# Altium PCB usb_to_ttl.PcbDoc
Units mil, origin at the board's own origin, x right, y up, seen from the top; angles counter-clockwise.
Board outline 6000 x 4000 mil, 2 copper layers (Top Layer, Bottom Layer); 21 components, 15 nets, 65 pads, 0 vias.
Unrouted connection lines stored in the file: 33.
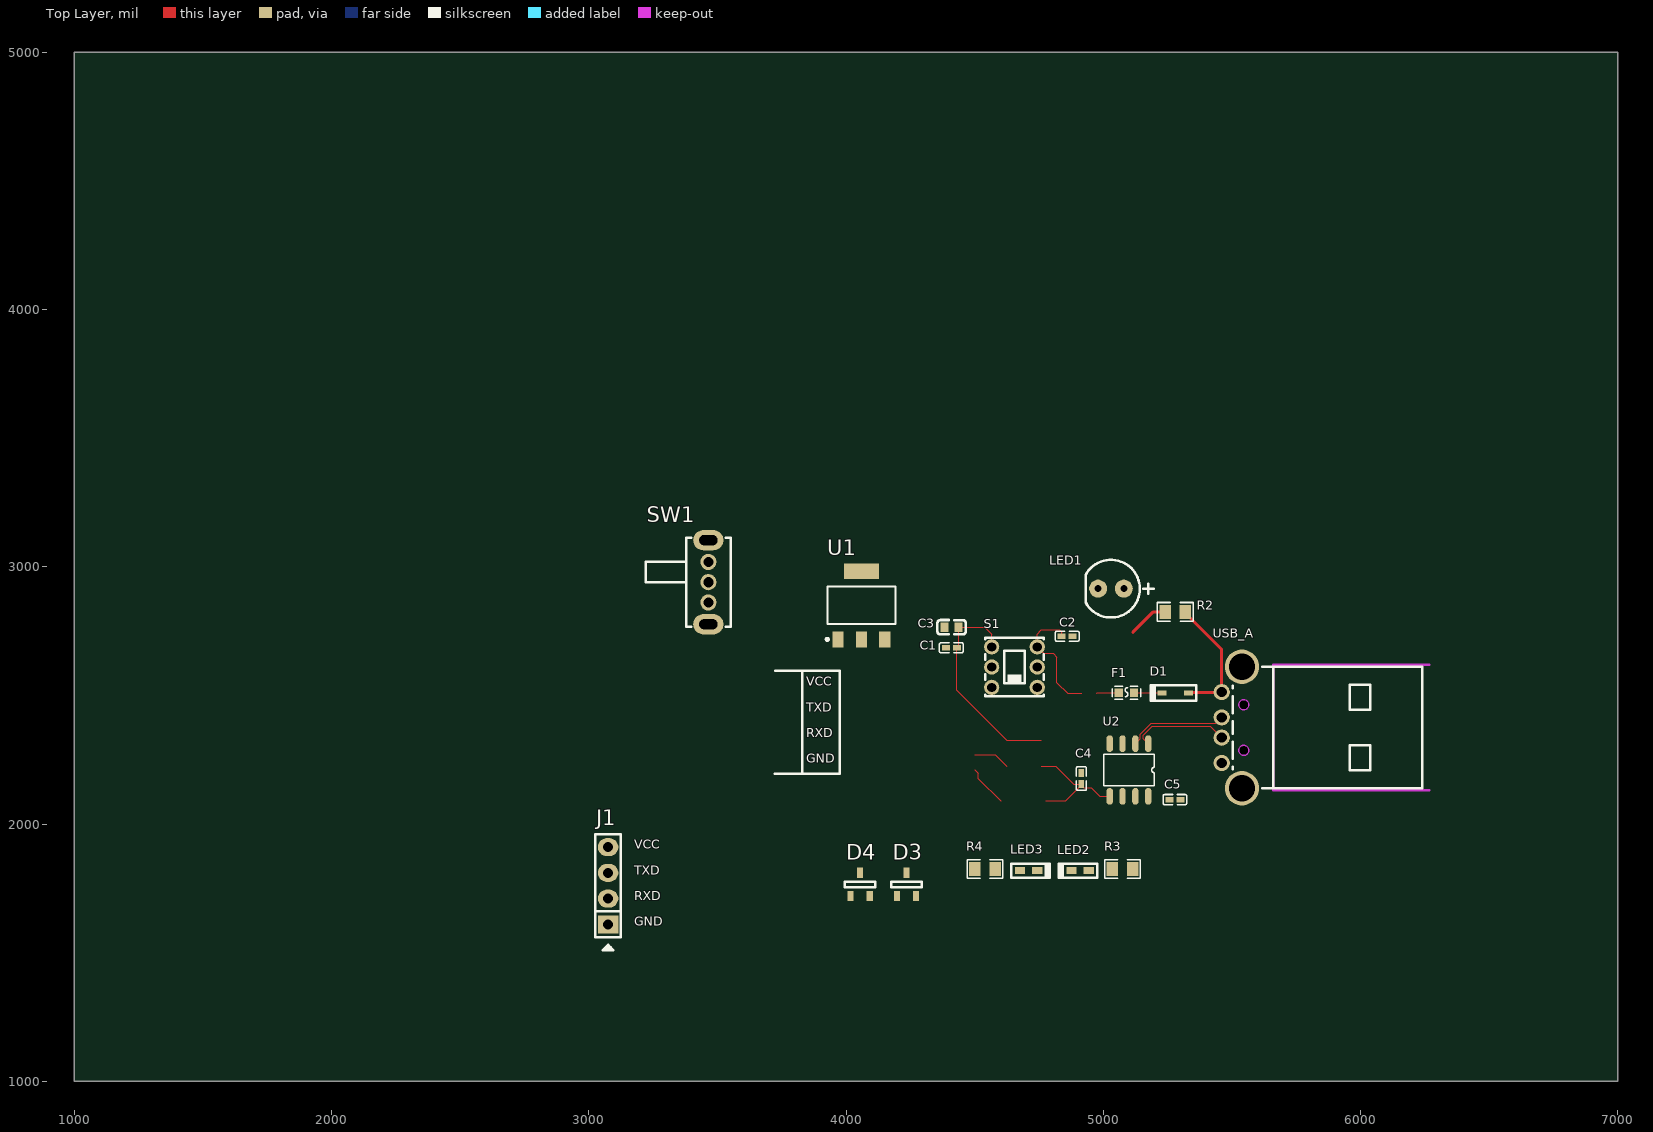
[diagram p0: Top Layer view]
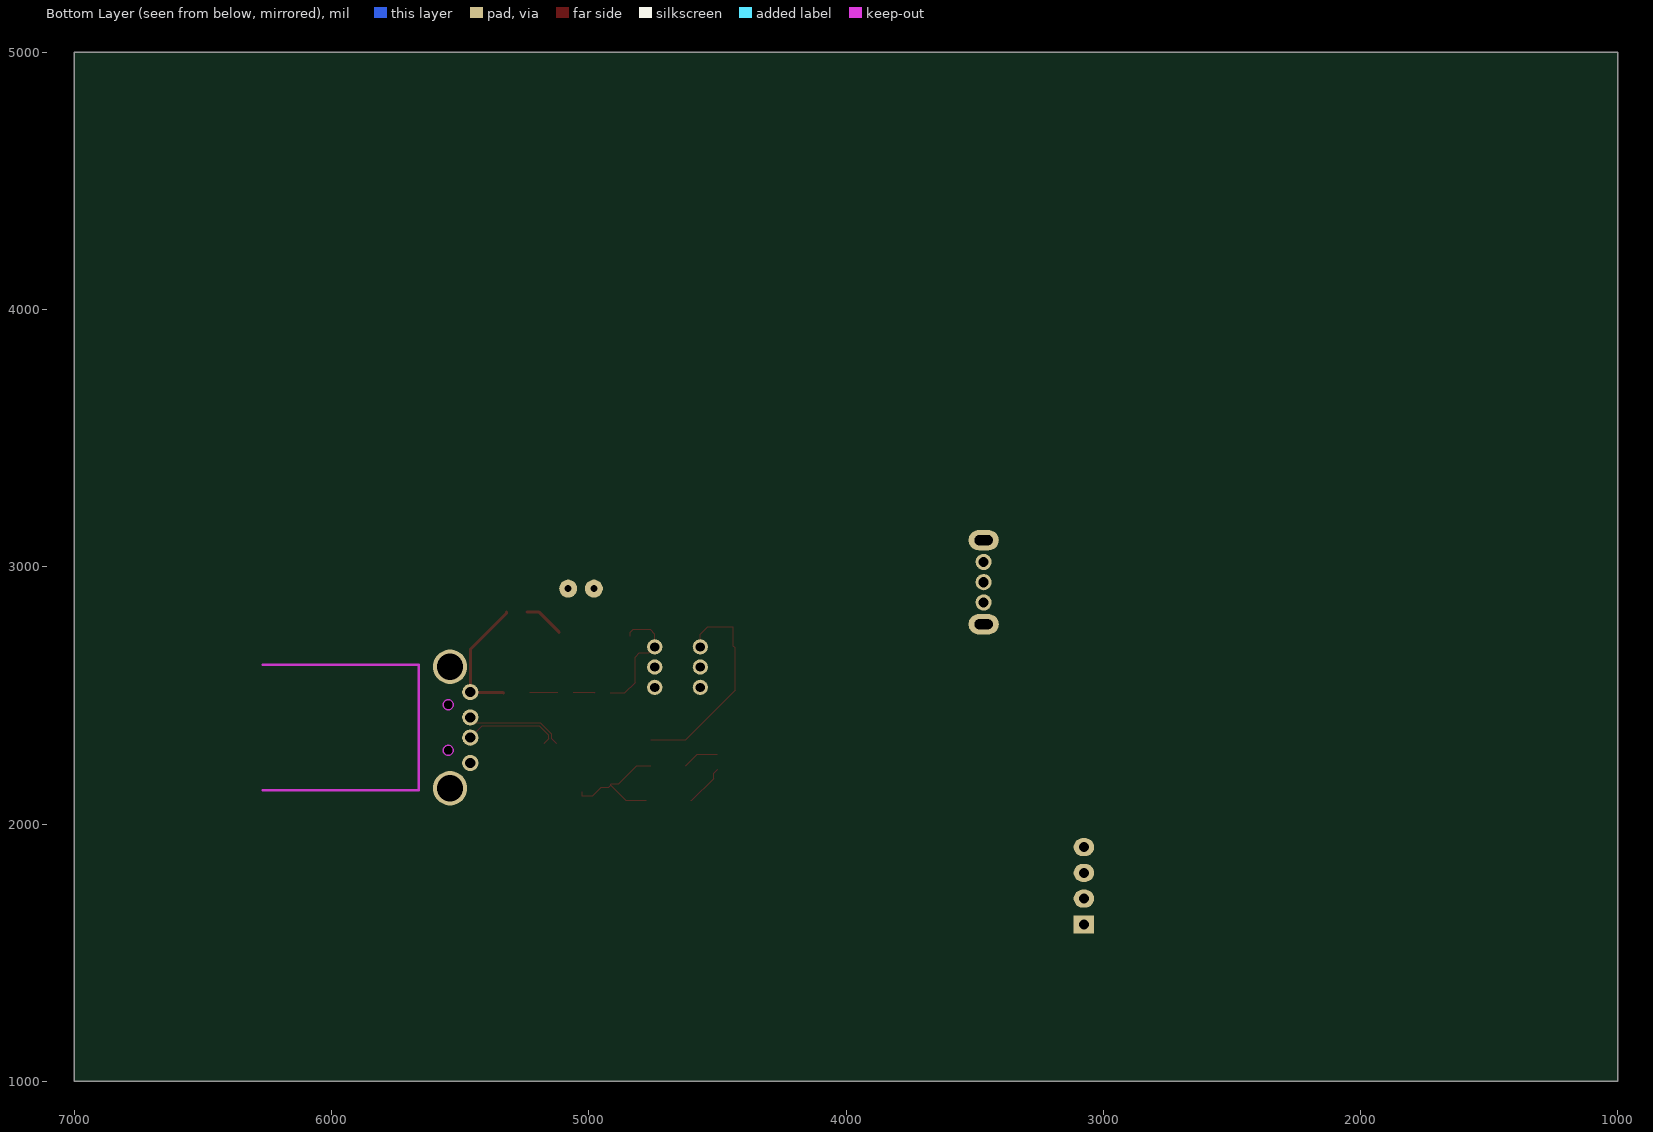
[diagram p1: Bottom Layer view, seen from below]

## Layer stack, top to bottom
Top Solder: solder mask 0.4, Solder Resist, Dk 3.5
Top Layer: signal copper 1.4
Dielectric 1: dielectric 12.6, FR-4, Dk 4.8
Bottom Layer: signal copper 1.4
Bottom Solder: solder mask 0.4, Solder Resist, Dk 3.5

## Board outline
1000,1000 7000,1000 7000,5000 1000,5000

## Design rules (kind name [scope] priority, off if disabled: settings)
Clearance [All] p1: gap=3.94 ignorepadtopadclearanceinfootprint=FALSE except(4.72: Arc-Via Track-Via)
DiffPairsRouting DiffPairsRouting_1 [All] p1: maxlimit=39.37 minlimit=3.94 mostfreqgap=7.09 toplayer_minwidth=3.94 toplayer_maxwidth=39.37 toplayer_prefwidth=3.94 bottomlayer_minwidth=3.94 bottomlayer_maxwidth=39.37 bottomlayer_prefwidth=3.94 maxuncoupledlength=500
HoleSize [All] p1: absolutevalues=TRUE maxlimit=102.36 minlimit=1 maxpercent=80.000 minpercent=20.000
MinimumSolderMaskSliver [All] p1: minsoldermaskwidth=0
PolygonConnect [All] p1: connectstyle=Direct reliefconductorwidth=10 reliefentries=4 polygonreliefangle="90 Angle" airgapwidth=10
RoutingVias [All] p1: holewidth=7.87 width=17.72 viastyle="Through Hole" minholewidth=7.87 minwidth=17.72 maxholewidth=39.37 maxwidth=78.74
SilkToSilkClearance [All] p1: silktosilkclearance=3.94
SilkToSolderMaskClearance [IsPad] p1: minsilkscreentomaskgap=3.94 clearancetoexposedcopper=TRUE
SolderMaskExpansion [All] p1: expansion=0.98 istentingtop=FALSE
Width [All] p1: maxlimit=78.74 minlimit=3.94 preferedwidth=3.94
25 further rules are at their usual default settings.

## Classes and differential pairs
differential pair USB: +USB_P -USB_N

## Components (designator, comment, footprint, x,y, rotation, side; value= is the part's Value field where it differs from the comment)
C1 "100nF" CAP-0402 4409.29,2685 r180 top
C2 "100nF" CAP-0402 4860,2730 r0 top
C3 "10uf" CAP-0603 4410,2765 r180 top
C4 "100nF" CAP-0402 4915,2176.46 r90 top
C5 "100nf 10v" CAP-0402 5278.54,2095 r0 top
D1 "1N5819WS" SOD-323 5280,2510 r180 top
D3 "BAV99" SOT-23-3 4235,1765 r0 top
D4 "BAV99" SOT-23-3 4055,1765 r0 top
F1 "MF-FSMF050X-21_MF-FSMF050X-2" F0603 5090,2510 r180 top
J1 "XH2.54 1X4" PIN-4-2.54-1.0 3075,1760 r90 top
LED1 "LED_BLUE" LED-D5 5030,2915 r180 top
LED2 "LED_RED" LED-0603 4910,1818.45 r180 top
LED3 "LED_GREEN" LED-0603 4710,1818.45 r0 top
R2 "120Ω 1/8W" RES-0805 5280,2825 r0 top
R3 "150Ω 1/8W" RES-0805 5075,1825 r0 top
R4 "120Ω 1/8W" RES-0805 4540,1825 r180 top
S1 "SW-TH_6P-L5.8-W5.8-P2.00-LS4.5-BL" KFC5858-Z 4655,2610 r270 top
SW1 "单刀双掷滑动开关" SW-TH_SK12D07VG5-1 3465,2940 r270 top
U1 "1117-3V3" SOT-223 4060,2850 r0 top
U2 "CH340N" SOP-8 5100,2210 r270 top
USB_A "USB 2.0 A 型公头，4 Pin，中间 2 Pin 间距 2.0 mm，两侧 2 Pin 间距 2.54 mm，直插 90° 弯折出线，无前定位柱，短体，兼容 LCSC C404965（首韩 AM90 系列）" USB-A-TH-C404965 5500,2375 r90 top

## Footprints (in the part's own frame and the unit in brackets; to place one, negate y for a bottom-side part, rotate by r counter-clockwise, add the part's x,y. Pads: shape width x height; smd on the part's side, far side on the other; paste and mask are expansions set on the pad)
CAP-0402 [mm]
  rect 0.79x0.54 smd: 1(-0.545,0) 2(0.545,0)
  silkscreen extent -1.17,-0.5 1.17,0.5, body extent -0.52,-0.27 0.52,0.28, height 0.55
CAP-0603 [mm]
  rect 0.8x0.9 smd: 1(-0.7,0) 2(0.7,0)
  silkscreen extent -1.41,-0.71 1.39,0.72, body extent -0.86,-0.48 0.89,0.47, height 0.87
F0603 [mil]
  rect 31.75x34.02 smd paste-3937.01 mask+2: 1(-29.66,0) 2(29.66,0)
  silkscreen extent -55,-25 55,25
KFC5858-Z [mm] "DIP-6P,5.8x5.8mm"
  round 1.5 hole 0.9 paste+0 mask+0.05: 1(-2,-2.25) 2(0,-2.25) 3(2,-2.25) 4(-2,2.25) 5(0,2.25) 6(2,2.25)
  silkscreen extent -2.9,-2.9 2.9,2.9
LED-0603 [mm] "LED, SMD, 0603"
  rect 1x0.7 smd: 1(-0.85,0) 2(0.85,0)
  silkscreen extent -1.7,-0.7 2.1,0.7, body extent -1.03,-0.46 1.03,0.45, height 0.85
LED-D5 [mil] "LED"
  round 70 hole 27.56: 1(-50,0) 2(50,0)
  silkscreen extent -165,-112 98,112, body extent -108,-118 105,119, height 485
PIN-4-2.54-1.0 [mil] "Pin Header"
  rect 70x80 hole 39.37: 1(-150,0)
  oval 70x80 hole 39.37: 2(-50,0) 3(50,0) 4(150,0)
  silkscreen extent -250,-50 200,50, body extent -200,-50 200,50, height 398
RES-0805 [mm]
  rect 1.133x1.377 smd paste-100 mask+0.051: 1(-1,0) 2(1,0)
  silkscreen extent -1.76,-0.92 1.76,0.92, body extent -1,-0.7 1,0.6, height 0.58
SOD-323 [mm] "SOD-323"
  rect 0.9x0.5 smd: 1(-1.3,0) 2(1.3,0)
  silkscreen extent -2.06,-0.76 2.41,0.79, body extent -1.35,-0.62 1.35,0.63, height 1.1
SOP-8 [mil]
  oval 65x25 smd: 1(-102.36,75) 2(-102.36,25) 3(-102.36,-25) 4(-102.36,-75) 5(102.36,-75) 6(102.36,-25) 7(102.36,25) 8(102.36,75)
  silkscreen extent -61,-98 61,98
SOT-23-3 [mm] "SOT-23-3"
  rect 0.6x1 smd: 1(-0.95,-1.15) 2(0.95,-1.15) 3(0,1.15)
  silkscreen extent -1.5,-0.27 1.5,0.27, body extent -1.46,-1.28 1.46,1.27, height 0.99
SOT-223 [mm]
  rect 1.1x1.55 smd: 1(-2.3,-3.375) 2(0,-3.375) 3(2.3,-3.375)
  rect 3.45x1.55 smd: 4(0,3.375)
  silkscreen extent -3.5,-3.48 3.35,1.85, body extent -3.3,-3.94 3.3,3.43, height 0.8
SW-TH_SK12D07VG5-1 [mm]
  round 1.6 hole 1: 1(-2,0) 2(0,0) 3(2,0)
  oval 2x3 hole 1 slot 1.8 at 90 deg: 4(4.15,0) 5(-4.15,0)
  silkscreen extent -4.4,-6.2 4.4,2.2
USB-A-TH-C404965 [mm]
  round 1.6 hole 1: 1(3.5,1) 2(1,1) 3(-1,1) 4(-3.5,1)
  round 3.4 hole 2.6: MH1(6,-1) MH2(-6,-1)
  Keep-Out Layer board cut-out: 2.75,-1.175 2.7,-1.392 2.562,-1.566 2.361,-1.663 2.139,-1.663 1.938,-1.566 1.8,-1.392 1.75,-1.175 1.75,-1.175 1.8,-0.958 1.938,-0.784 2.139,-0.688 2.361,-0.688 2.562,-0.784 2.7,-0.958 2.75,-1.175
  Keep-Out Layer board cut-out: -1.75,-1.175 -1.8,-1.392 -1.938,-1.566 -2.139,-1.663 -2.361,-1.663 -2.562,-1.566 -2.701,-1.392 -2.75,-1.175 -2.75,-1.175 -2.701,-0.958 -2.562,-0.784 -2.361,-0.688 -2.139,-0.688 -1.938,-0.784 -1.8,-0.958 -1.75,-1.175
  Keep-Out Layer circle w0.025: c2.25,-1.175 r0.5
  Keep-Out Layer circle w0.025: c-2.25,-1.175 r0.5
  Keep-Out Layer region: 2.75,-1.175 2.7,-1.392 2.562,-1.566 2.361,-1.663 2.139,-1.663 1.938,-1.566 1.8,-1.392 1.75,-1.175 1.75,-1.175 1.8,-0.958 1.938,-0.784 2.139,-0.688 2.361,-0.688 2.562,-0.784 2.7,-0.958 2.75,-1.175
  Keep-Out Layer region: -1.75,-1.175 -1.8,-1.392 -1.938,-1.566 -2.139,-1.663 -2.361,-1.663 -2.562,-1.566 -2.701,-1.392 -2.75,-1.175 -2.75,-1.175 -2.701,-0.958 -2.562,-0.784 -2.361,-0.688 -2.139,-0.688 -1.938,-0.784 -1.8,-0.958 -1.75,-1.175
  Keep-Out Layer lines w0.254: -6.2,-4.098 6.2,-4.098 ; -6.2,-4.098 -6.2,-19.498 -6.2,-4.098 ; -6.2,-4.098 6.2,-4.098 ; 6.2,-4.098 6.2,-19.498 6.2,-4.098
  silkscreen extent -6.01,-18.81 6.01,-0.1

## Part data
C1 C2 C3 C4 C5: library part CAP, "Capacitor"
D1: library part 1N5819
D3 D4: "Diode"
J1: "Connector"
LED1 LED2 LED3: library part LED1, "单色发光二极管"
R2 R3 R4: library part RES, "Resistor"
S1: library part KFC5858-Z
SW1: library part SK12D07VG51_SK12D07VG5
U1: library part 1117, "Linear Regulator"
U2: "无TNOW"
USB_A: library part USB_AM90, "USB"

## Nets (pads, with @x,y where several pads share a name; then routed paths per layer and width w, separated by ;. In a path a pad name is that pad's centre, name@x,y a point inside that pad or via, vN(x,y) a via of type N, cw(c..) or ccw(c..) an arc to the next point about the centre after c; other vN are vias at no path point)
3V3: C5.1 SW1.3 U1.2 U1.4 U2.8
1117: C1.1 C3.1 S1.1 SW1.1 U1.3 | length 847.9
  Top Layer w3.94: S1.1 4566.42,2738.58 4540,2765 C3.1 4437.56,2691.81 C1.1 4430.75,2519.25 4625,2325 4760,2325
BTN: C2.1 F1.2 S1.4 | length 561
  Top Layer w3.94: C2.1 4838.54,2744.84 4828.38,2755 4760,2755 4743.58,2738.58 S1.4 4769.38,2662.94 4804.75,2662.94 4820,2647.69 4820,2550 4861.99,2508.01 4915.69,2508.01 ; 4975,2508.01 4976.99,2510 F1.2
ChipVcc: C4.1 J1.1 SW1.2 U2.5 | length 497.4
  Top Layer w3.94: 4760,2225 4815,2225 4885,2155 C4.1 C4.1@4915,2150.08 ; 4776.32,2090 4854.92,2090 C4.1@4915,2150.08 ; U2.5@5025,2125 U2.5 4986.35,2107.64 4952.58,2141.42 4923.66,2141.42 C4.1@4915,2150.08
GND: C1.2 C2.2 C3.2 C4.2 C5.2 D3.3 D4.3 J1.4 LED1.2 LED2.2 LED3.2 SW1.4 SW1.5 U1.1 U2.3 USB_A.4
NetD1_2: D1.2 F1.1 | length 109.2
  Top Layer w3.94: F1.1 D1.2
NetD3_1: D3.1 D3.2 J1.2
NetLED1_1: LED1.1 R2.1 | length 158.8
  Top Layer w11.81: 5115,2745 5195,2825 R2.1
NetLED2_1: LED2.1 R3.1
NetLED3_1: LED3.1 R4.1
RXD: D4.1 D4.2 R4.2 U2.7
TXD: R3.2 U2.6
USB_N: U2.2 USB_A.2 | length 388.3
  Top Layer w3.94: U2.2 5144.49,2331.85 5144.49,2349.57 5185.95,2391.02 5437.29,2391.02 USB_A.2
USB_P: U2.1 USB_A.3 | length 378.7
  Top Layer w3.94: U2.1 5155.51,2331.85 5155.51,2345 5190.51,2380 5416.26,2380 USB_A.3
USB_VCC: D1.1 R2.2 USB_A.1 | length 501.3
  Top Layer w3.94: USB_A.1@5460,2513.43 USB_A.1
  Top Layer w11.81: R2.2 5319.37,2820.19 5460,2679.56 USB_A.1@5460,2513.43 ; D1.1 5332.58,2511.4 5459.24,2511.4 USB_A.1
pads on no net: J1.3 S1.2 S1.3 S1.5 S1.6 U2.4 USB_A.MH1 USB_A.MH2
copper on no net: | length 308.6
  Top Layer w3.94: 4500,2210.34 4501.13,2210.34 4515.04,2196.44 4515.04,2176.67 4601.71,2090 4603.68,2090 ; 4500,2269.66 4580.35,2269.66 4625,2225

## Silkscreen, mask and mechanical layers (free items; w line width, h text height)
Top Overlay:
  lines w10: 3724.09,2195 3830,2195 ; 3724.88,2595 3830,2595 ; 3830,2195 3830,2595 ; 3830,2195 3830,2195 ; 3830,2195 3975,2195 ; 3830,2595 3830,2595 ; 3830,2595 3975,2595 3975,2475 3975,2315 3975,2195 ; 3975,2195 3975,2195
  text "VCC" at 3845.06,2525.67 h60
  text "TXD" at 3845,2425 h60
  text "RXD" at 3845,2325 h60
  text "GND" at 3845,2225.67 h60
  text "VCC" at 3176.45,1892.23 h60
  text "TXD" at 3176.39,1791.56 h60
  text "RXD" at 3176.39,1691.56 h60
  text "GND" at 3176.39,1592.23 h60